# EAGLE board osi-brain_rev_0 (EAGLE 6.3)
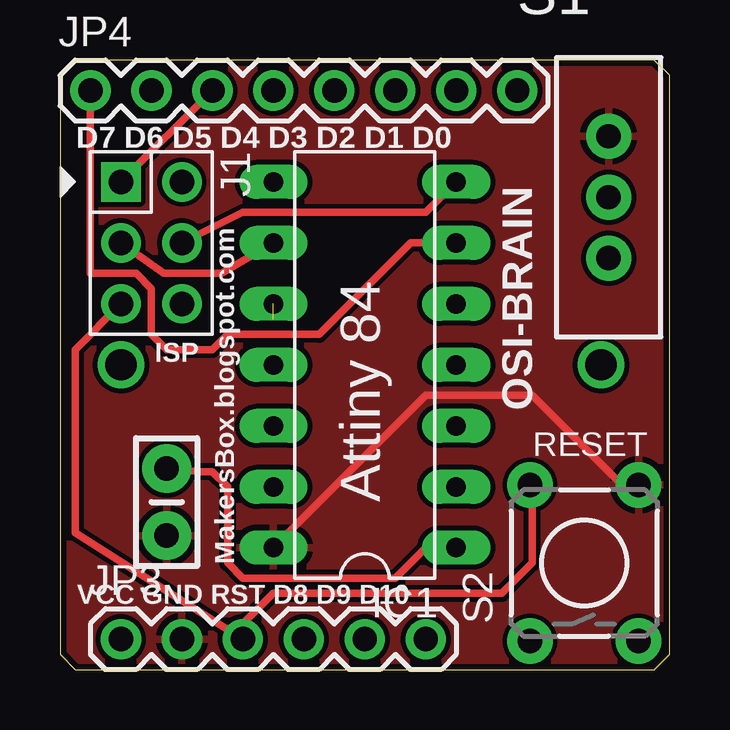
[diagram p0: board, top side]
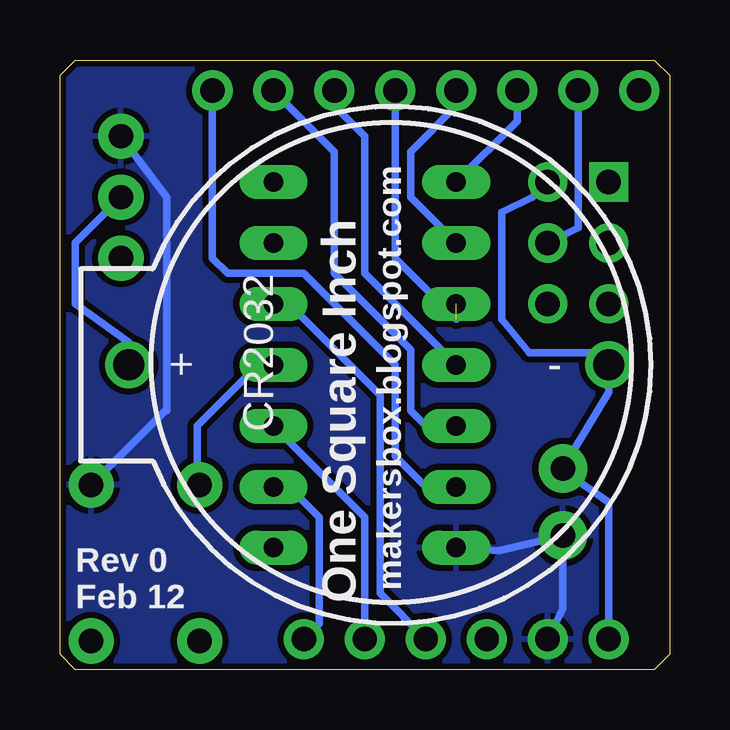
[diagram p1: board, bottom side, seen from below]

Size 25.4 x 25.4 mm. Coordinates in mm from the lower left corner, seen from the top.
Outline: 0,24.77 0.64,25.4 24.77,25.4 24.77,25.4 25.4,24.77 25.4,0.64 24.77,0 24.77,0 0.64,0 0,0.64 0,24.77
Outline: 0,24.77 0,24.77
Copper layers (1*16): Top 0.035mm / dielectric 1.5mm / Bottom 0.035mm
Design rules "SparkFun": minimum track width 8mil, minimum drill 20mil, track to track 8mil, track to pad 8mil, pad to pad 8mil, via to via 8mil, smd to smd 8mil, copper to edge 10mil, drill to drill 8mil, minimum pad ring 12mil, minimum via ring 10mil, stop-mask expansion 4mil, vias tented up to drill 25mil, thermal gap 10mil

## Footprints (pad centres in the part's own frame; a part is rotated, then mirrored left to right if it is on the bottom)
BATTCOM_20MM_PTH = drill 1.3: 1 20,0; 2 0,0
CAP-PTH-SMALL-KIT = drill 1.016 pad 2.032: 1 -1.397,0; 2 1.397,0
DIL14 = drill 0.813 long: 1 -7.62,-3.81; 2 -5.08,-3.81; 3 -2.54,-3.81; 4 0,-3.81; 5 2.54,-3.81; 6 5.08,-3.81; 7 7.62,-3.81; 8 7.62,3.81; 9 5.08,3.81; 10 2.54,3.81; 11 0,3.81; 12 -2.54,3.81; 13 -5.08,3.81; 14 -7.62,3.81
HEADER_PRG_2X03 = drill 1.02 pad 1.632 square: 1 -2.54,-1.27 | drill 1.02 pad 1.632: 2 -2.54,1.27; 3 0,-1.27; 4 0,1.27; 5 2.54,-1.27; 6 2.54,1.27
1X06 = drill 1.016 pad 1.676: 1 0,0; 2 2.54,0; 3 5.08,0; 4 7.62,0; 5 10.16,0; 6 12.7,0
1X08 = drill 1.016 pad 1.676: 1 0,0; 2 2.54,0; 3 5.08,0; 4 7.62,0; 5 10.16,0; 6 12.7,0; 7 15.24,0; 8 17.78,0
SWITCH-SPDT = drill 1.016 pad 1.88: 1 0,2.54; 2 0,0; 3 0,-2.54
TACTILE-PTH = drill 1.016 pad 1.88: 1 -3.251,2.261; 2 3.251,2.261; 3 -3.251,-2.261; 4 3.251,-2.261

## Placement (x,y rotation side)
BAT  [BATTCOM_20MM_PTH]  2.54,12.7 0 top
C1  [CAP-PTH-SMALL-KIT]  4.45,6.99 90 top
IC1  TINY24/44/84-PU  [DIL14]  12.7,12.7 90 top
J1  CON_HEADER_PRG_AVR_ICSP-PTH  [HEADER_PRG_2X03]  3.81,17.78 270 top
JP3  [1X06]  2.54,1.27 0 top
JP4  [1X08]  1.27,24.13 0 top
S1  [SWITCH-SPDT]  22.86,19.68 0 top
S2  [TACTILE-PTH]  21.84,4.45 90 top

## Library data of the parts
BAT JP3 JP4 = SparkFun_mod
C1 S1 S2 = SparkFun
IC1 = avr-7
J1 = dp_devices

## Nets
D0: IC1.13 JP4.8
D1: IC1.12 JP4.7
D2: IC1.11 JP4.6
D3: IC1.10 JP4.5
D4: IC1.9 J1.3 JP4.4
D5: IC1.8 J1.1 JP4.3
D6: IC1.7 J1.4 JP4.2
D7: IC1.6 JP4.1
D8: IC1.5 JP3.4
D9: IC1.3 JP3.5
D10: IC1.2 JP3.6
GND: C1.1 IC1.14 JP3.2 S1.1 S2.4
N$1: BAT.1 S1.2
N$2: J1.6
RESET: IC1.4 J1.5 JP3.3 S2.2
VCC: BAT.2 C1.2 IC1.1 J1.2 JP3.1

## Tracks (layer width: path | path; a pad name or v marks a point on that pad's centre or on a via)
D0
  Bottom 0.305: IC1.13 10.16,7.62 11.43,8.89 11.43,12.7 15.24,16.51 18.41,16.51 19.05,17.14 JP4.8
D1
  Bottom 0.305: IC1.12 10.16,10.16 10.79,10.79 10.79,13.34 13.97,16.51 13.97,21.59 JP4.7
D2
  Bottom 0.305: JP4.6 13.97,23.5 12.7,22.23 12.7,16.51 IC1.11
D3  (1 unrouted)
  Bottom 0.305: JP4.5 11.43,17.14 8.89,14.61
D4
  Top 0.305: J1.3 4.32,16.51 6.73,16.51 IC1.9
  Bottom 0.305: JP4.4 8.89,23.5 10.79,21.59 10.79,19.68 IC1.9
D5
  Top 0.305: J1.1 JP4.3
  Bottom 0.305: JP4.3 6.35,22.86 IC1.8
D6
  Top 0.305: J1.4 7.62,19.05 15.24,19.05 IC1.7
  Bottom 0.305: JP4.2 3.81,18.41 J1.4
D7
  Top 0.305: IC1.6 14.61,17.78 10.79,13.97 6.99,13.97 6.35,13.34 4.45,13.34 3.81,13.97 3.81,15.88 3.17,16.51 1.27,16.51 JP4.1
D8
  Bottom 0.305: IC1.5 15.88,15.24 12.06,11.43 12.06,3.17 JP3.4
D9
  Bottom 0.305: IC1.3 12.7,6.35 JP3.5
D10
  Bottom 0.305: IC1.2 15.88,7.62 14.61,6.35 14.61,1.91 JP3.6
GND
  Top 0.305: IC1.14 15.24,11.43 19.68,11.43 23.5,7.62 24.03,7.62 S2.4
  Bottom 0.305: S1.1 20.95,19.68 20.95,10.79 21.01,10.79 S2.4 | JP3.2 4.45,2.54 C1.1 7.11,4.95 IC1.14
  pour Bottom (isolate 0.254): -1.27,26.67 26.67,26.67 26.67,-1.27 -1.27,-1.27
  pour Top: -0.64,26.04 26.67,26.04 26.67,0 26.04,-0.64 -0.64,-0.64
N$1
  Bottom 0.305: S1.2 24.77,17.78 24.77,15.24 22.54,13.65 BAT.1
RESET
  Top 0.305: S2.2 19.68,7.59 19.68,4.45 18.41,3.17 8.89,3.17 7.62,1.91 JP3.3 0.64,5.71 0.64,13.34 J1.5
  Bottom 0.305: IC1.4 17.14,12.7 19.68,10.16 19.68,7.8 S2.2
VCC
  Top 0.305: IC1.1 15.24,5.08 13.97,3.81 7.62,3.81 6.99,4.45 6.99,7.62 6.35,8.26 5.84,8.26 C1.2
  Bottom 0.305: J1.2 5.71,19.68 6.99,19.05 6.99,14.61 5.84,13.21 3.3,13.21 2.67,12.83 BAT.2 2.54,11.56 C1.2 4.57,8.38 2.54,6.99 JP3.1

## Text on the board
tPlace: D7 D6 D5 D4 D3 D2 D1 D0 | ISP | OSI-BRAIN | RESET | Attiny 84 | MakersBox.blogspot.com | VCC GND RST D8 D9 D10
bPlace: makersbox.blogspot.com | One Square Inch | Rev 0 / Feb 12